# EAGLE board CT_schematic (EAGLE 7.6.0)

Size 100 x 80 mm. Coordinates in mm from the lower left corner, seen from the top.
Outline: 0,0 100,0 100,80 0,80 0,0
Copper layers (1*16): Top 0.035mm / dielectric 1.5mm / Bottom 0.035mm
Design rules "default": minimum track width 10mil, minimum drill 24mil, track to track 8mil, track to pad 8mil, pad to pad 8mil, via to via 8mil, smd to smd 8mil, copper to edge 40mil, drill to drill 8mil, minimum pad ring 10mil, minimum via ring 8mil, stop-mask expansion 4mil, vias tented up to drill 0mil, thermal gap 10mil

## Footprints (pad centres in the part's own frame; a part is rotated, then mirrored left to right if it is on the bottom)
C0603 = smd 0.8 x 0.8: 1 -0.762,0; 2 0.762,0
C0402 = smd 0.5 x 0.5: 1 -0.508,0; 2 0.508,0
C0805 = smd 1.2 x 1.3: 1 -1.016,0; 2 1.016,0
C1206 = smd 1.3 x 1.6: 1 -1.524,0; 2 1.524,0
L0603 = smd 0.8 x 0.8: 1 -0.762,0; 2 0.762,0
L0805 = smd 1.2 x 1.3: 1 -1.016,0; 2 1.016,0
R0603 = smd 0.8 x 0.8: 1 -0.762,0; 2 0.762,0
TFBGA64 = smd 0.35 x 0.35: A1 -1.75,1.75; A2 -1.25,1.75; A3 -0.75,1.75; A4 -0.25,1.75; A5 0.25,1.75; A6 0.75,1.75; A7 1.25,1.75; A8 1.75,1.75; B1 -1.75,1.25; B2 -1.25,1.25; B3 -0.75,1.25; B4 -0.25,1.25; B5 0.25,1.25; B6 0.75,1.25; B7 1.25,1.25; B8 1.75,1.25; C1 -1.75,0.75; C2 -1.25,0.75; C3 -0.75,0.75; C4 -0.25,0.75; C5 0.25,0.75; C6 0.75,0.75; C7 1.25,0.75; C8 1.75,0.75; D1 -1.75,0.25; D2 -1.25,0.25; D3 -0.75,0.25; D4 -0.25,0.25; D5 0.25,0.25; D6 0.75,0.25; D7 1.25,0.25; D8 1.75,0.25; E1 -1.75,-0.25; E2 -1.25,-0.25; E3 -0.75,-0.25; E4 -0.25,-0.25; E5 0.25,-0.25; E6 0.75,-0.25; E7 1.25,-0.25; E8 1.75,-0.25; F1 -1.75,-0.75; F2 -1.25,-0.75; F3 -0.75,-0.75; F4 -0.25,-0.75; F5 0.25,-0.75; F6 0.75,-0.75; F7 1.25,-0.75; F8 1.75,-0.75; G1 -1.75,-1.25; G2 -1.25,-1.25; G3 -0.75,-1.25; G4 -0.25,-1.25; G5 0.25,-1.25; G6 0.75,-1.25; G7 1.25,-1.25; G8 1.75,-1.25; H1 -1.75,-1.75; H2 -1.25,-1.75; H3 -0.75,-1.75; H4 -0.25,-1.75; H5 0.25,-1.75; H6 0.75,-1.75; H7 1.25,-1.75; H8 1.75,-1.75
SSOP-28 = smd 1.5 x 0.4: 1 -3.625,4.225; 2 -3.625,3.575; 3 -3.625,2.925; 4 -3.625,2.275; 5 -3.625,1.625; 6 -3.625,0.975; 7 -3.625,0.325; 8 -3.625,-0.325; 9 -3.625,-0.975; 10 -3.625,-1.625; 11 -3.625,-2.275; 12 -3.625,-2.925; 13 -3.625,-3.575; 14 -3.625,-4.225; 15 3.625,-4.225; 16 3.625,-3.575; 17 3.625,-2.925; 18 3.625,-2.275; 19 3.625,-1.625; 20 3.625,-0.975; 21 3.625,-0.325; 22 3.625,0.325; 23 3.625,0.975; 24 3.625,1.625; 25 3.625,2.275; 26 3.625,2.925; 27 3.625,3.575; 28 3.625,4.225
FCI_10118193-0001LF = smd 0.4 x 1.35: 1 -1.3,2.675; 2 -0.65,2.675; 3 0,2.675; 4 0.65,2.675; 5 1.3,2.675 | smd 1.6 x 1.4: 6 -3.2,2.45; 7 3.2,2.45 | smd 1.9 x 1.9: 8 -1.2,0; 9 1.2,0 | hole 0.5: -3.3,0; 3.3,0
SAMTEC_FTSH-105-01-L-DV-K = smd 0.762 x 2.794: 1 -2.54,-2.032; 2 -2.54,2.032; 3 -1.27,-2.032; 4 -1.27,2.032; 5 0,-2.032; 6 0,2.032; 7 1.27,-2.032; 8 1.27,2.032; 9 2.54,-2.032; 10 2.54,2.032
ABLS-25.000MHZ-B2F-T = smd 5.6 x 2.8: 1 -3.81,0; 2 5.69,0
ABLS-12.000MHZ-B4-T = smd 5.6 x 2.8: 1 0,0; 2 9.5,0
ASEK = smd 1.4 x 1: 1 -1.1,-0.8; 2 1.1,-0.8; 3 1.1,0.8; 4 -1.1,0.8
TSOT-23-5 = smd 1.3 x 0.62: 1 -1.31,0.95; 2 -1.31,0; 3 -1.31,-0.95; 4 1.31,-0.95; 5 1.31,0.95
DFN8_2X3MC = smd 0.813 x 0.305: 1 -1.398,0.75; 2 -1.398,0.25; 3 -1.398,-0.25; 4 -1.398,-0.75; 5 1.398,-0.75; 6 1.398,-0.25; 7 1.398,0.25; 8 1.398,0.75 | smd 1.753 x 1.549: 9 0,0
JST-2-SMD = smd 1 x 4.6: 1 -1,-3.7; 2 1,-3.7 | smd 1.6 x 3.4: NC1 -3.4,1.5; NC2 3.4,1.5
SON-6 = smd 0.55 x 0.3: 1 -0.355,0.5 | smd 0.52 x 0.3: 2 -0.37,0; 3 -0.37,-0.5; 4 0.37,-0.5; 5 0.37,0; 6 0.37,0.5
SW_4-1437565-2 = smd 1.4 x 2.1: 1 -2.23,4.55; 2 -2.23,-4.55; 3 2.23,4.55; 4 2.23,-4.55
LGM67K-G1J2-24-Z = smd 0.8 x 1.4: A -2,0; C 0,0
NC7SZ125M5X = smd 1.3 x 0.7: 1 -1.3,0.95; 2 -1.3,0; 3 -1.3,-0.95; 4 1.3,-0.95; 5 1.3,0.95

## Placement (x,y rotation side)
C1  1e-07  [C0603]  -15.24,58.42 0 top  (outside the outline)
C2  1e-07  [C0603]  -19.05,58.42 0 top  (outside the outline)
C3  1e-07  [C0603]  -22.86,58.42 0 top  (outside the outline)
C4  1e-07  [C0603]  -26.67,58.42 0 top  (outside the outline)
C5  4.7e-06  [C0603]  -59.69,53.34 0 top  (outside the outline)
C6  1e-07  [C0603]  -30.48,58.42 0 top  (outside the outline)
C7  4.7e-06  [C0603]  -63.5,53.34 0 top  (outside the outline)
C8  1e-08  [C0603]  -34.29,58.42 0 top  (outside the outline)
C9  1e-06  [C0603]  -38.1,58.42 0 top  (outside the outline)
C10  1e-11  [C0402]  -15.24,63.5 0 top  (outside the outline)
C11  1e-11  [C0402]  -19.05,63.5 0 top  (outside the outline)
C12  1e-07  [C0402]  -22.86,63.5 0 top  (outside the outline)
C13  4.7e-06  [C0805]  -21.59,46.99 0 top  (outside the outline)
C14  1e-07  [C0402]  -26.67,63.5 0 top  (outside the outline)
C15  1e-07  [C0402]  -30.48,63.5 0 top  (outside the outline)
C16  1e-07  [C0402]  -34.29,63.5 0 top  (outside the outline)
C17  1e-08  [C0402]  -38.1,63.5 0 top  (outside the outline)
C18  1e-05  [C0805]  -26.67,46.99 0 top  (outside the outline)
C19  1e-05  [C0805]  -31.75,46.99 0 top  (outside the outline)
C20  1e-07  [C0402]  -41.91,63.5 0 top  (outside the outline)
C21  1e-05  [C1206]  -48.26,40.64 0 top  (outside the outline)
C22  1e-05  [C1206]  -54.61,40.64 0 top  (outside the outline)
C23  1e-08  [C0402]  -45.72,63.5 0 top  (outside the outline)
C24  1e-08  [C0402]  -49.53,63.5 0 top  (outside the outline)
F1  240.0  [L0603]  -41.91,58.42 0 top  (outside the outline)
I1  2.2e-06  [L0805]  -36.83,46.99 0 top  (outside the outline)
R2  1000.0  [R0603]  -45.72,58.42 0 top  (outside the outline)
R4  4700.0  [R0603]  -49.53,58.42 0 top  (outside the outline)
R5  10000.0  [R0603]  -15.24,53.34 0 top  (outside the outline)
R6  4700.0  [R0603]  -53.34,58.42 0 top  (outside the outline)
R7  10000.0  [R0603]  -20.32,53.34 0 top  (outside the outline)
R8  10000.0  [R0603]  -25.4,53.34 0 top  (outside the outline)
R9  10000.0  [R0603]  -30.48,53.34 0 top  (outside the outline)
R10  10000.0  [R0603]  -35.56,53.34 0 top  (outside the outline)
R11  10000.0  [R0603]  -40.64,53.34 0 top  (outside the outline)
R12  5.0  [R0603]  -57.15,58.42 0 top  (outside the outline)
R13  220000.0  [R0603]  -54.61,46.99 0 top  (outside the outline)
R14  1000000.0  [R0603]  -49.53,46.99 0 top  (outside the outline)
R15  10000.0  [R0603]  -45.72,53.34 0 top  (outside the outline)
R16  10000.0  [R0603]  -50.8,53.34 0 top  (outside the outline)
R17  9100.0  [R0603]  -60.96,58.42 0 top  (outside the outline)
R18  680000.0  [R0603]  -59.69,46.99 0 top  (outside the outline)
R19  120000.0  [R0603]  -64.77,46.99 0 top  (outside the outline)
R20  2000.0  [R0603]  -64.77,58.42 0 top  (outside the outline)
R21  10000.0  [R0603]  -55.88,53.34 0 top  (outside the outline)
U1  STM32L051R8H7  [TFBGA64]  -58.42,20.32 0 top  (outside the outline)
U2  FT232RL-REEL  [SSOP-28]  -20.32,7.62 0 top  (outside the outline)
U3  10118193-0001LF  [FCI_10118193-0001LF]  -19.05,31.75 0 top  (outside the outline)
U4  FTSH-105-01-L-DV-K  [SAMTEC_FTSH-105-01-L-DV-K]  -49.53,7.62 0 top  (outside the outline)
U5  ABLS-25.000MHZ-B2F-T  [ABLS-25.000MHZ-B2F-T]  -57.15,31.75 0 top  (outside the outline)
U6  ABLS-12.000MHZ-B4-T  [ABLS-12.000MHZ-B4-T]  -29.21,40.64 0 top  (outside the outline)
U7  ASEK-32.768KHz-ECST  [ASEK]  -40.64,31.75 0 top  (outside the outline)
U8  ltc3406es5  [TSOT-23-5]  -41.91,46.99 0 top  (outside the outline)
U9  MCP73831T-2ACI/MC  [DFN8_2X3MC]  -58.42,62.23 0 top  (outside the outline)
U10  S2B-PH-SM4-TB(LF)(SN)  [JST-2-SMD]  -41.91,21.59 0 top  (outside the outline)
U11  TPS3895ADRYR  [SON-6]  -52.07,62.23 0 top  (outside the outline)
U12  4-1437565-2  [SW_4-1437565-2]  -27.94,21.59 0 top  (outside the outline)
U13  Q65110A2395  [LGM67K-G1J2-24-Z]  -36.83,40.64 0 top  (outside the outline)
U14  nc7sz125m5x  [NC7SZ125M5X]  -59.69,39.37 0 top  (outside the outline)
U15  nc7sz125m5x  [NC7SZ125M5X]  -15.24,46.99 0 top  (outside the outline)

## Library data of the parts
C1-C24 F1 I1 R2 R4-R21 U1-U15 = circuit_tree

## Nets
CLK_CRYSTAL_U1_C1: C10.1 U1.C1 U5.1
CLK_CRYSTAL_U1_D1: C11.1 U1.D1 U5.2
CLK_CRYSTAL_U2_27: U2.27 U6.1
CLK_CRYSTAL_U2_28: U2.28 U6.2
CLK_U1_A1: U1.A1 U7.3
GND: C1.2 C2.2 C3.2 C4.2 C5.2 C6.2 C7.2 C8.2 C9.2 C10.2 C11.2 C12.2 C13.2 C14.2 C15.2 C16.2 C17.2 C18.2 C19.1 C19.2 C20.2 C21.2 C22.2 C23.2 C24.2 R2.2 R5.2 R8.2 R12.2 R13.2 R17.2 R19.2 R20.2 U1.C2 U1.D4 U1.D5 U1.D6 U1.F1 U2.7 U2.18 U2.21 U2.25 U2.26 U3.5 U3.6 U3.7 U3.8 U3.9 U4.3 U4.5 U7.2 U8.2 U9.6 U9.9 U10.2 U11.2 U13.C U14.2 U14.3 U15.1 U15.3
INPUT_USBPOWER_5V: C21.1 R6.1 R21.2 U3.1 U9.1 U9.2
NET_U1_B4: R5.1 U1.B4
NET_U1_E1: R4.1 U1.E1 U15.4
NET_U1_H1: C8.1 C9.1 F1.1 U1.G1 U1.H1
NET_U1_H7: U13.A
NET_U1_H8: U12.3 U12.4
NET_U2_14: R7.1 U2.14
NET_U2_17: C14.1 U2.17
NET_U2_19: R8.1 U2.19
NET_U3_2: U2.16 U3.2
NET_U3_3: U2.15 U3.3
NET_U3_19: R6.2
NET_U4_9: R12.1 U4.9
NET_U8_1: U8.1
NET_U8_3: I1.1 U8.3
NET_U8_5: R13.1 R14.1 U8.5
NET_U8_ATNET_3: I1.2 R14.2
NET_U9_5: R21.1 U9.5
NET_U9_8: R20.1 U9.8
NET_U11_1: R16.1 R17.1 U11.1
NET_U11_3: R18.2 R19.1 U11.3
NET_U11_4: R15.1 U11.4 U14.4 U15.2
NET_U12_1: R2.1 U12.1 U12.2
PROC_LPUART1_CTS: U1.G4 U2.3
PROC_LPUART1_RTS: U1.B5 U2.11
PROC_LPUART1_RX: U1.B6 U2.1
PROC_LPUART1_TX: U1.B7 U2.5
PROC_SYS_SWCLK: R10.1 U1.A7 U4.4
PROC_SYS_SWDIO: R11.1 U1.A8 U4.2
RST_OUT_U4_JTAG_RST_B: R9.1 U4.10 U14.1
VCC_S1_3V7: C18.1 C22.1 U8.4 U9.3 U9.4 U10.1
VCC_TIER1_3V3: C1.1 C2.1 C3.1 C4.1 C5.1 C6.1 C7.1 C12.1 C13.1 C15.1 C16.1 C17.1 C19.2 C20.1 C23.1 C24.1 F1.2 I1.2 R4.2 R7.2 R9.2 R10.2 R11.2 R14.2 R15.2 R16.2 R18.1 U1.B2 U1.D2 U1.E4 U1.E5 U1.E6 U2.4 U2.20 U4.1 U7.4 U11.6 U14.5 U15.5

## Tracks (layer width: path | path; a pad name or v marks a point on that pad's centre or on a via)
CLK_CRYSTAL_U1_C1  (2 unrouted)
CLK_CRYSTAL_U1_D1  (2 unrouted)
CLK_CRYSTAL_U2_27  (1 unrouted)
CLK_CRYSTAL_U2_28  (1 unrouted)
CLK_U1_A1  (1 unrouted)
GND  (60 unrouted)
INPUT_USBPOWER_5V  (5 unrouted)
NET_U1_B4  (1 unrouted)
NET_U1_E1  (2 unrouted)
NET_U1_H1  (4 unrouted)
NET_U1_H8  (1 unrouted)
NET_U2_14  (1 unrouted)
NET_U2_17  (1 unrouted)
NET_U2_19  (1 unrouted)
NET_U3_2  (1 unrouted)
NET_U3_3  (1 unrouted)
NET_U4_9  (1 unrouted)
NET_U8_3  (1 unrouted)
NET_U8_5  (2 unrouted)
NET_U8_ATNET_3  (1 unrouted)
NET_U9_5  (1 unrouted)
NET_U9_8  (1 unrouted)
NET_U11_1  (2 unrouted)
NET_U11_3  (2 unrouted)
NET_U11_4  (3 unrouted)
NET_U12_1  (2 unrouted)
PROC_LPUART1_CTS  (1 unrouted)
PROC_LPUART1_RTS  (1 unrouted)
PROC_LPUART1_RX  (1 unrouted)
PROC_LPUART1_TX  (1 unrouted)
PROC_SYS_SWCLK  (2 unrouted)
PROC_SYS_SWDIO  (2 unrouted)
RST_OUT_U4_JTAG_RST_B  (2 unrouted)
VCC_S1_3V7  (5 unrouted)
VCC_TIER1_3V3  (38 unrouted)